# Altium PCB v0.3.PcbDoc
Units mil, origin at the board's own origin, x right, y up, seen from the top; angles counter-clockwise.
Board outline 1750 x 1350 mil, 4 copper layers (Top Layer, Signal Layer 1, Signal Layer 2, Bottom Layer), stack 30.634 mil thick; 75 components, 40 nets, 204 pads, 36 vias.
Unrouted connection lines stored in the file: 2.
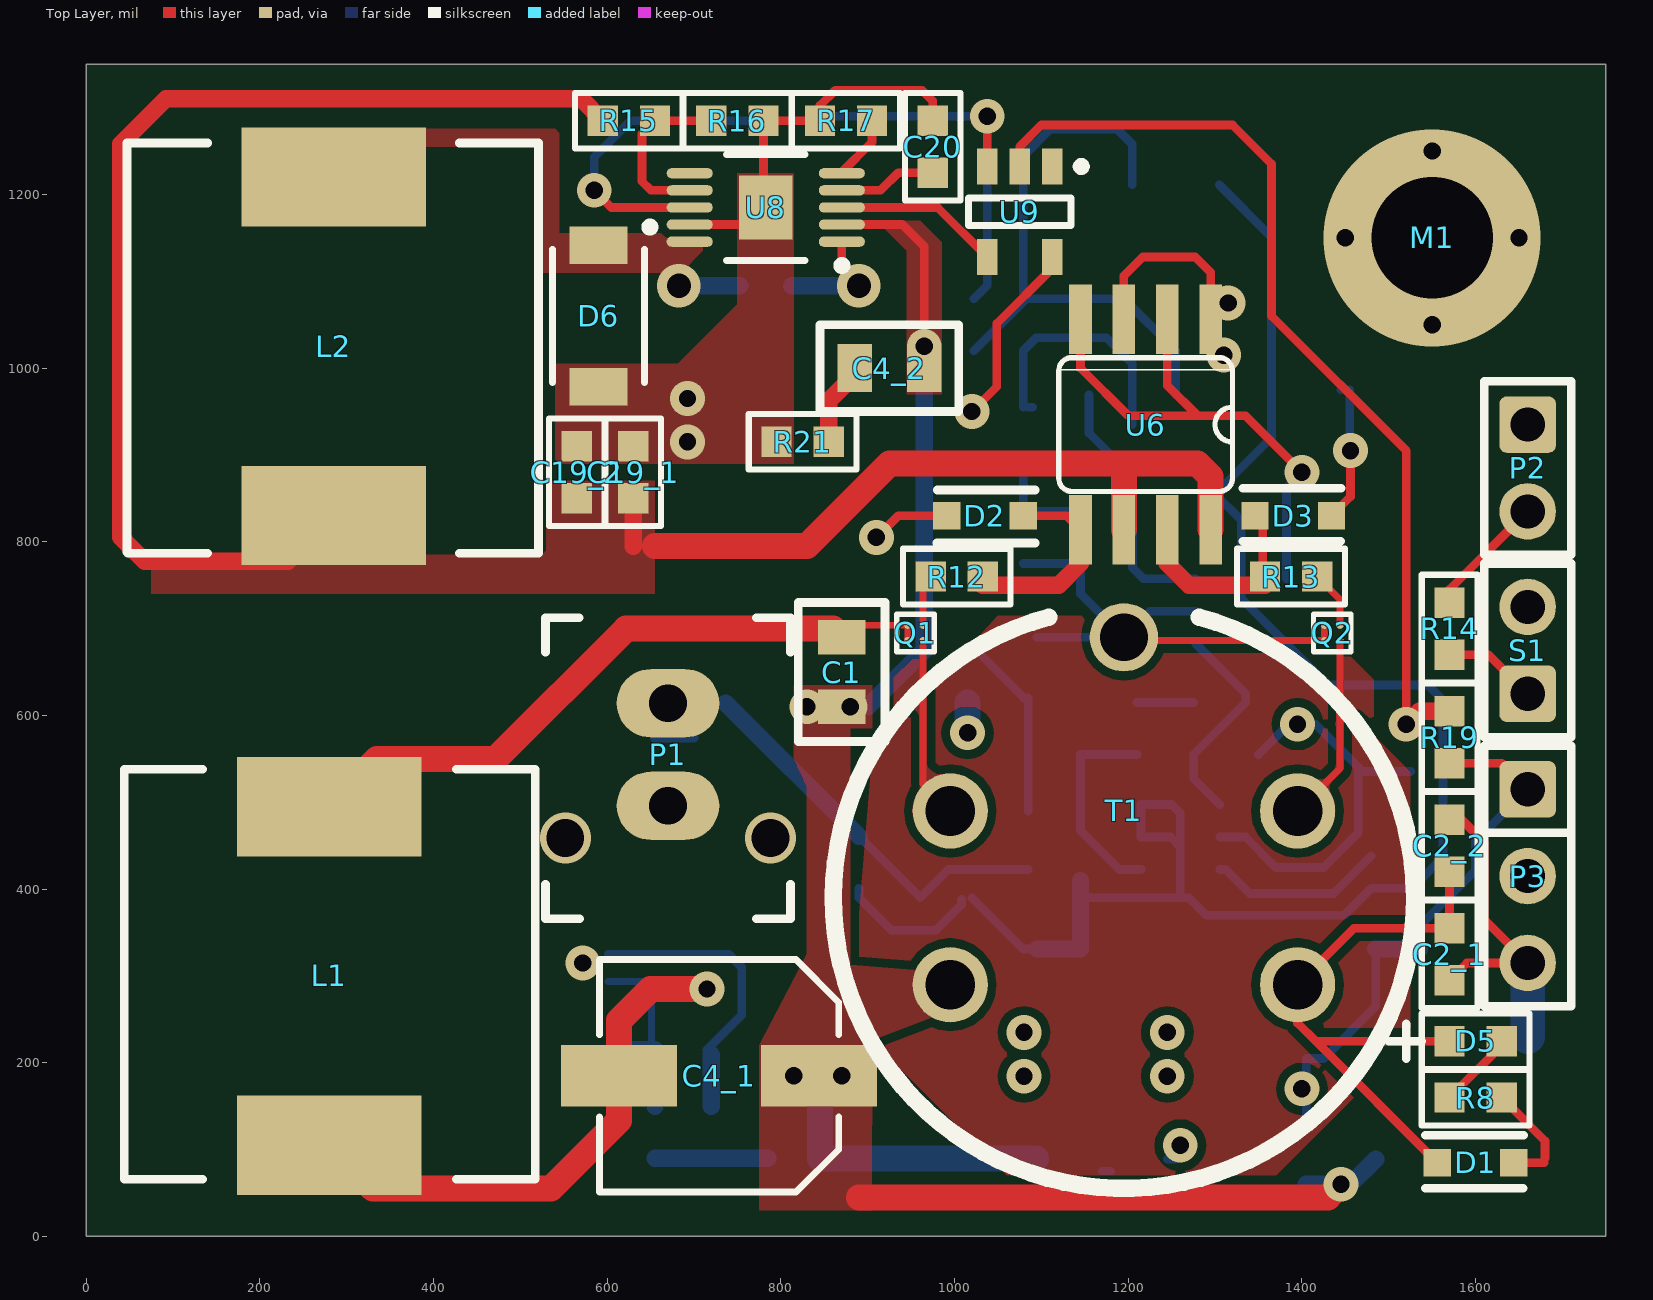
[diagram p0: Top Layer view]
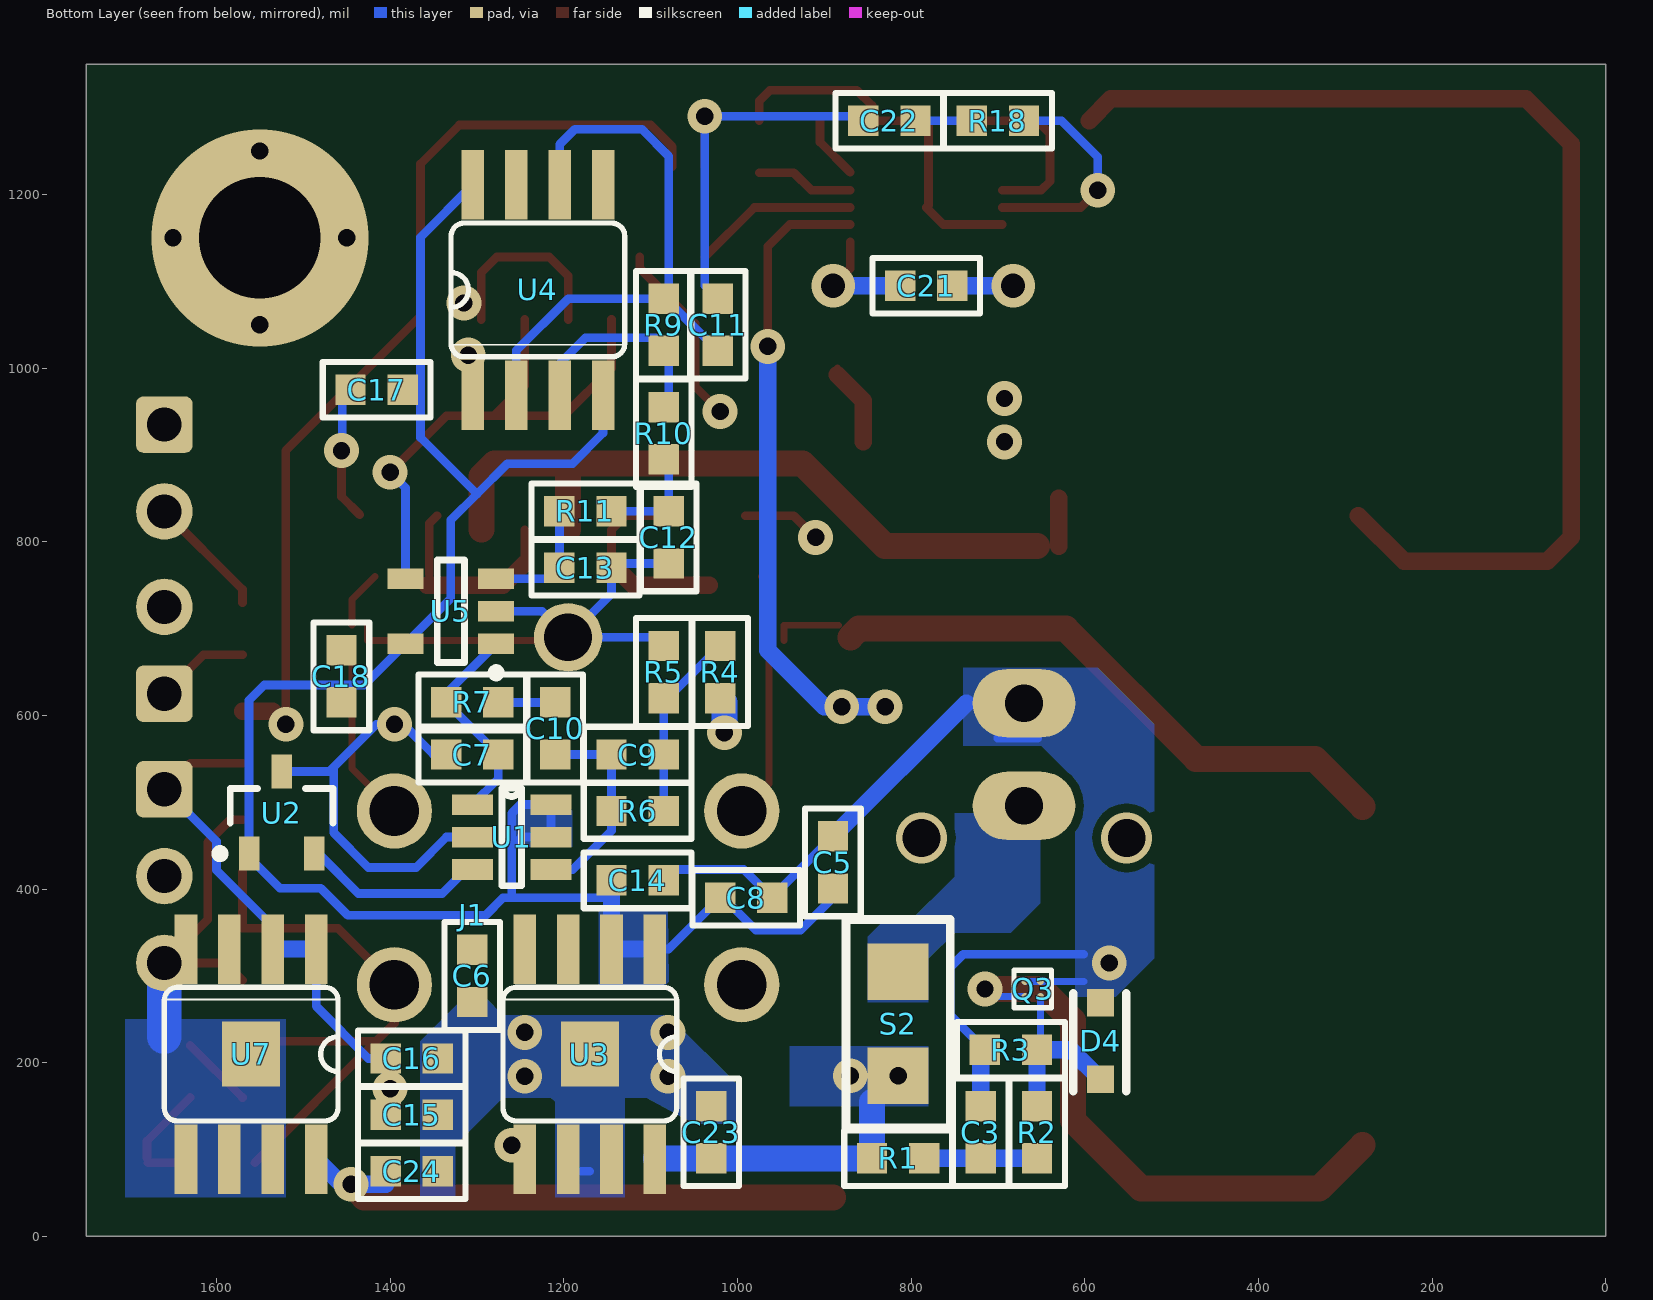
[diagram p1: Bottom Layer view, seen from below]
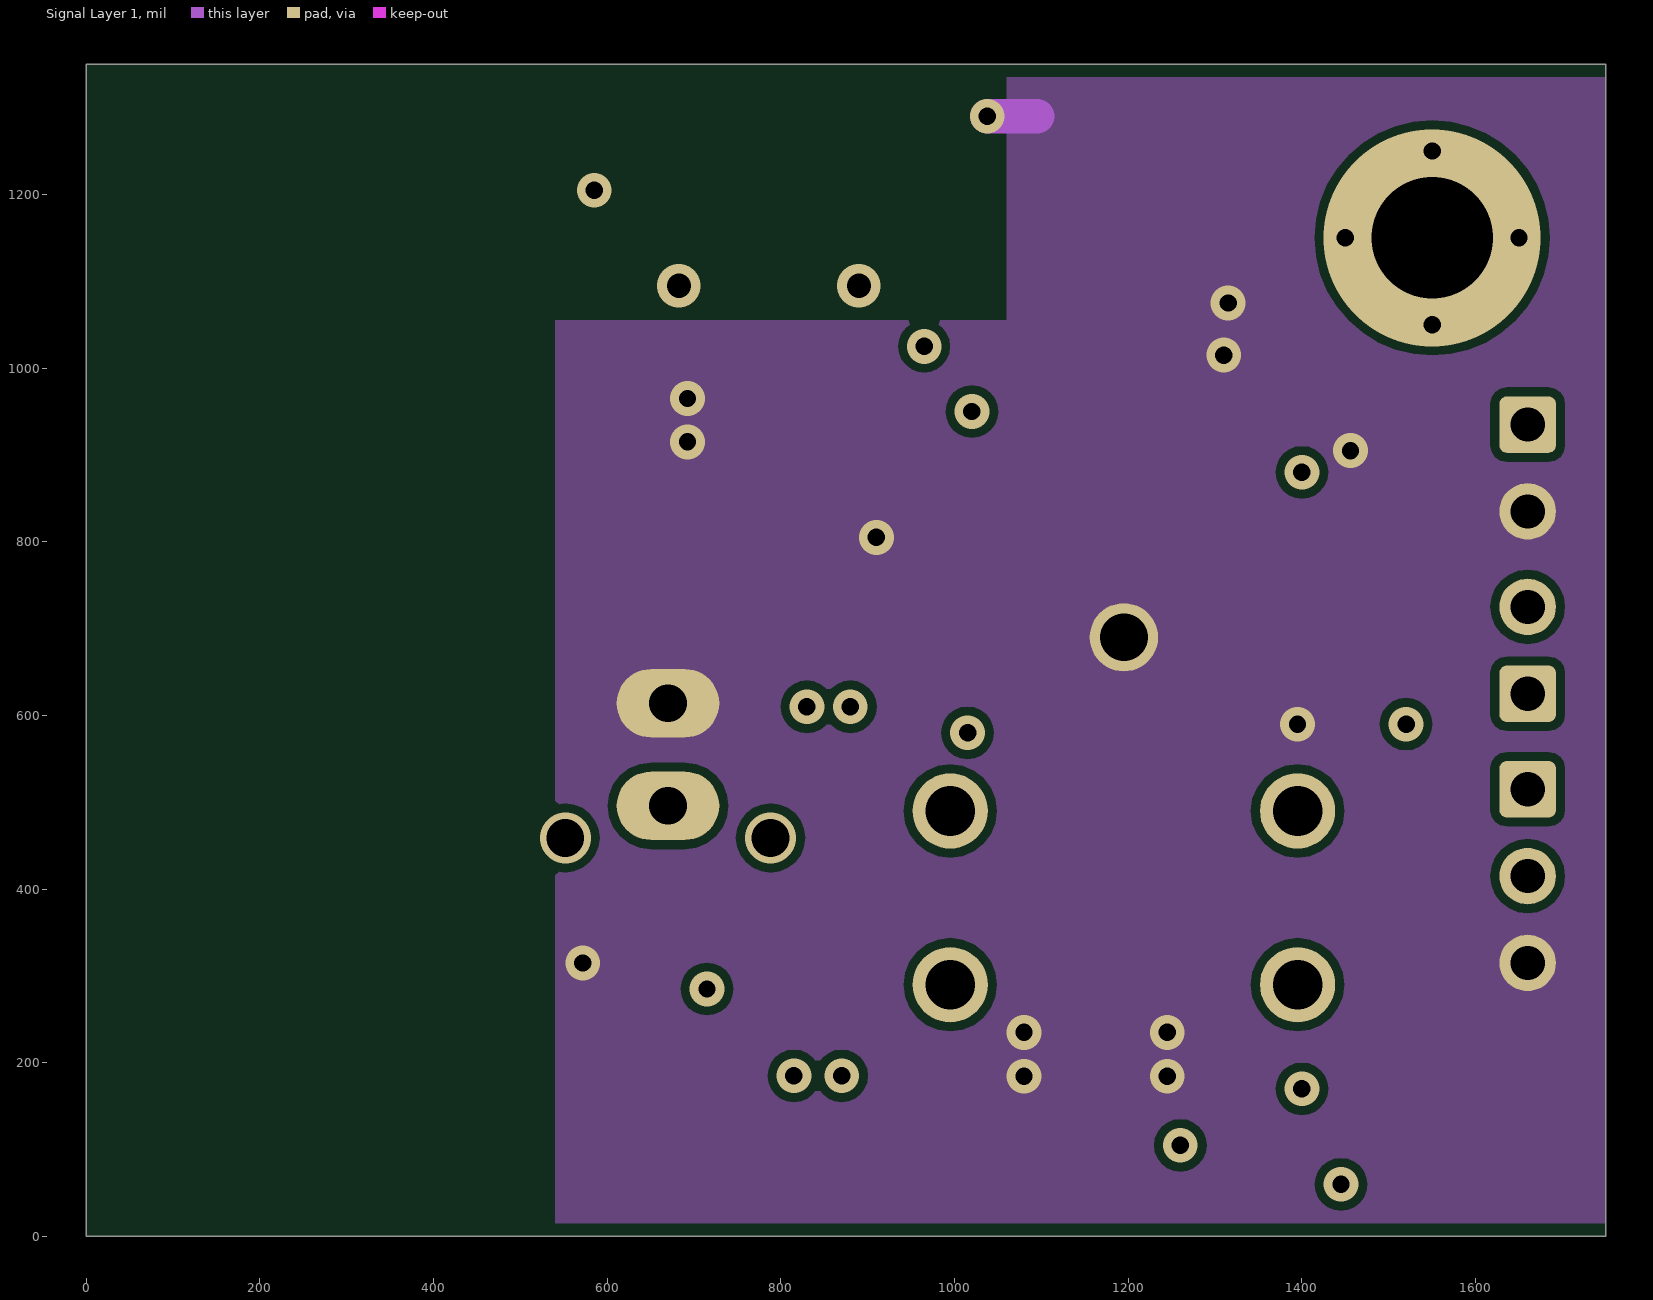
[diagram p2: Signal Layer 1]
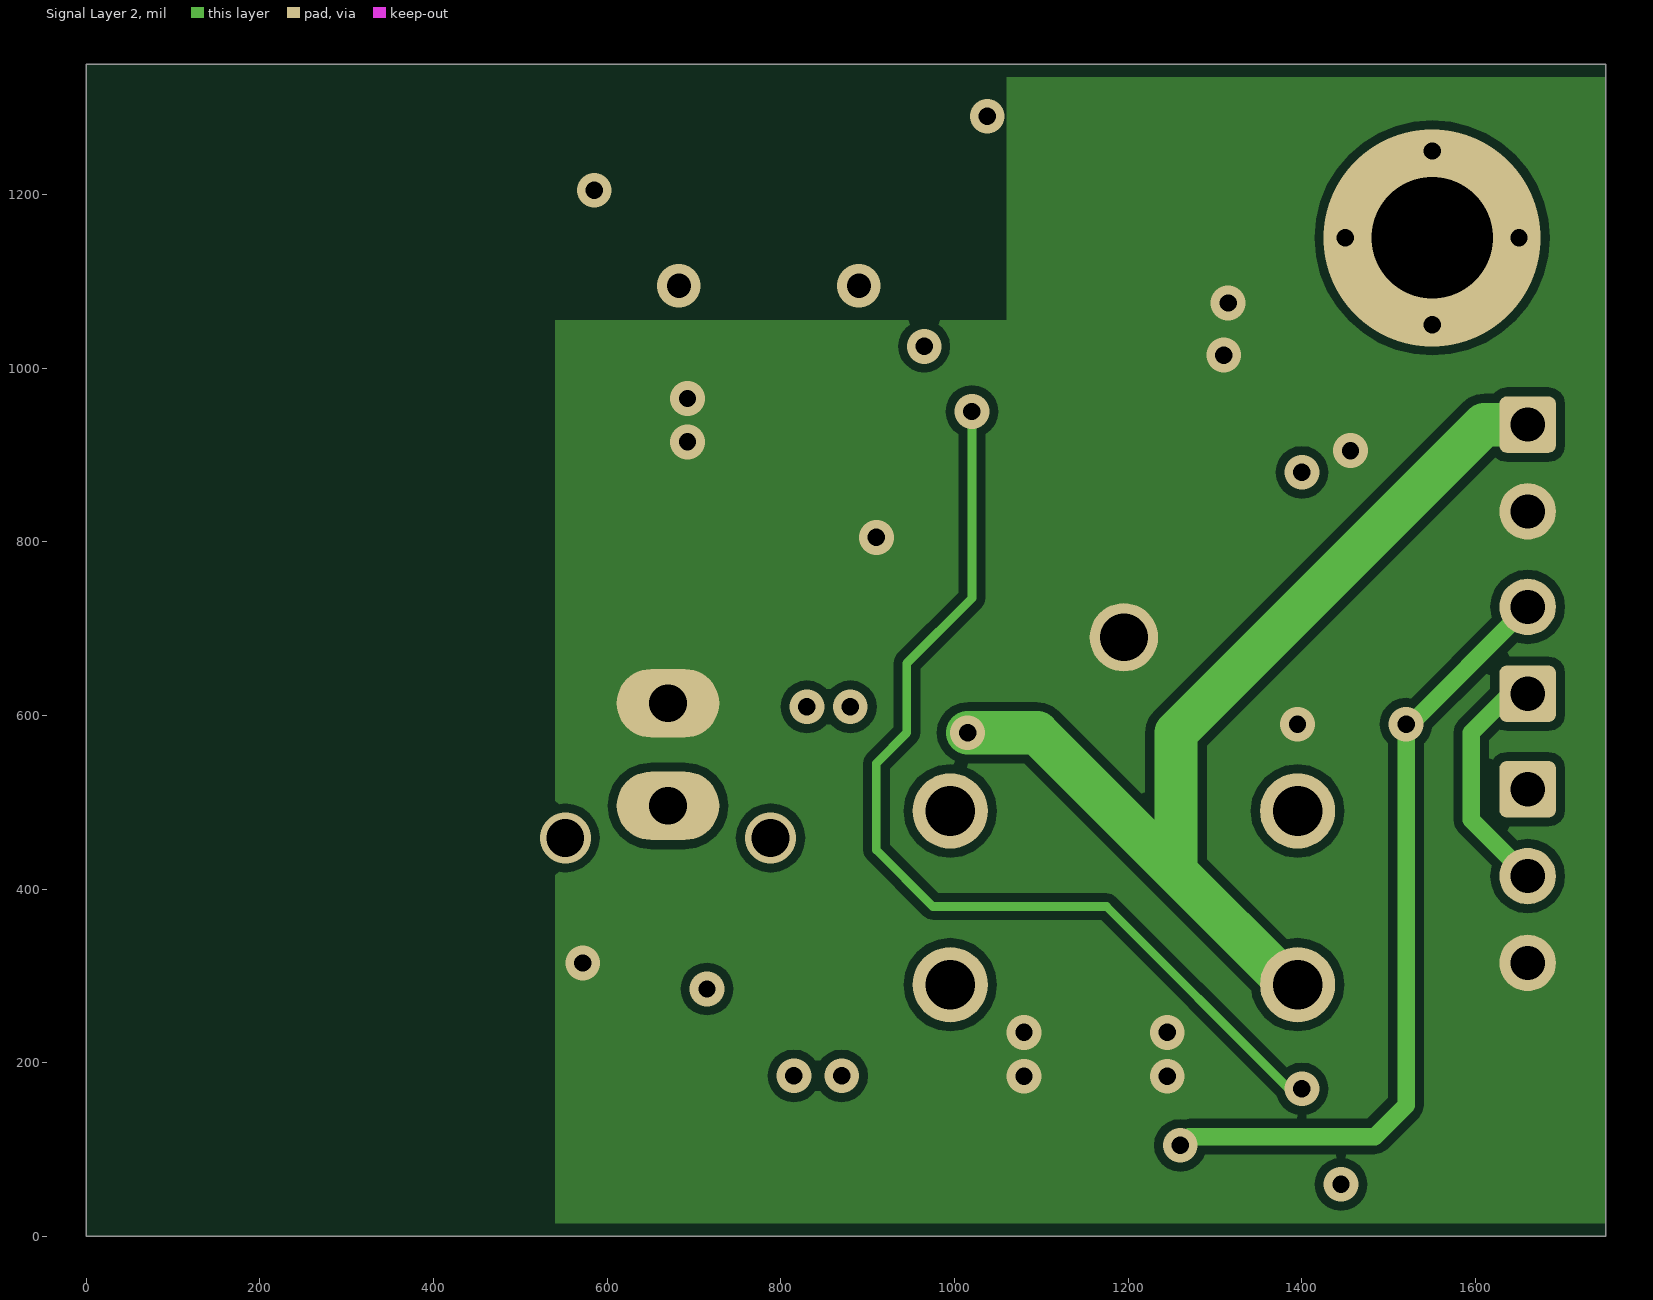
[diagram p3: Signal Layer 2]

## Layer stack, top to bottom
Top Solder: solder mask 0.4, Solder Resist, Dk 3.5
Top Layer: signal copper 1.4
Dielectric 1: core 10, FR-4, Dk 4.2
Signal Layer 1: signal copper 1.417
Dielectric 3: prepreg 5, Dk 4.2
Signal Layer 2: signal copper 1.417
Dielectric 2: core 10, Dk 4.2
Bottom Layer: signal copper 1.4
Bottom Solder: solder mask 0.4, Solder Resist, Dk 3.5

## Board outline
0,0 0,1350 1750,1350 1750,0

## Design rules (kind name [scope] priority, off if disabled: settings)
Clearance [All] p1: gap=10 ignorepadtopadclearanceinfootprint=FALSE except(0: Arc-Hole Track-Hole SMDPad-Hole THPad-Hole Via-Hole Fill-Hole Poly-Hole Region-Hole Text-Hole)
PolygonConnect [All] p1: connectstyle=Direct reliefconductorwidth=10 reliefentries=4 polygonreliefangle="90 Angle" airgapwidth=10
RoutingVias [All] p1: holewidth=28 width=50 viastyle="Through Hole" minholewidth=28 minwidth=50 maxholewidth=28 maxwidth=50
SilkToSilkClearance [All] p1 off: silktosilkclearance=10
SolderMaskExpansion [All] p1: expansion=4
Width [All] p1: maxlimit=50 minlimit=8 preferedwidth=10 midlayer1_minwidth=10 midlayer2_minwidth=10 minimp=50.000000 maximp=50.000000 favimp=50.000000
29 further rules are at their usual default settings.

## Components (designator, comment, footprint, x,y, rotation, side; value= is the part's Value field where it differs from the comment)
C1 "TriCap" TRICAP_0805 870,650 r270 top locked value=1u
C2_1 "TriCap" TRICAP_0603 1570,325 r90 top value=10u
C2_2 "TriCap" TRICAP_0603 1570,450 r270 top value=10u
C3 "Cap" SMD0603_CAP 720,120 r270 bottom value=100n
C4_1 "Cap" CAP_RADIAL_D 728.86,185 r180 top value=10u
C4_2 "TriCap" tricap_0805 925,1000 r0 top value=1u
C5 "Cap" SMD0603_CAP 890,430.75 r90 bottom value=2.2u
C6 "Cap" SMD0603_CAP 1305.28,300 r270 bottom value=2.2u
C7 "Cap" SMD0603_CAP 1305.28,555 r0 bottom value=330p
C8 "Cap" SMD0603_CAP 990,390 r180 bottom value=10n
C9 "Cap" SMD0603_CAP 1115,555 r0 bottom value=500p
C10 "Cap" SMD0603_CAP 1210,585 r270 bottom value=440p
C11 "Cap" SMD0603_CAP 1022.5,1050 r270 bottom value=330p
C12 "Cap" SMD0603_CAP 1079,805 r90 bottom value=330p
C13 "Cap" SMD0603_CAP 1175,770 r180 bottom value=1n
C14 "Cap" SMD0603_CAP 1115,410 r180 bottom value=10n
C15 "Cap" SMD0603_CAP 1375,140 r180 bottom value=2.2u
C16 "Cap" SMD0603_CAP 1375,205 r180 bottom value=10n
C17 "Cap" SMD0603_CAP 1415.57,975 r0 bottom value=10n
C18 "Cap" SMD0603_CAP 1456,645 r90 bottom value=10n
C19_1 "TriCap" TRICAP_0603 630,880 r270 top value=10u
C19_2 "TriCap" TRICAP_0603 565,880 r270 top value=10u
C20 "Cap" SMD0603_CAP 975,1255 r90 top value=100n
C21 "Cap" SMD0603_CAP 782.6,1095 r180 bottom value=100n
C22 "Cap" SMD0603_CAP 825,1285 r0 bottom value=4.7n
C23 "Cap" SMD0603_cap 1030,120 r270 bottom value=100n
C24 "Cap" SMD0603_cap 1375,75 r0 bottom value=100n
D1 "Zener" SOD-323F 1600,85 r180 top
D2 "Zener" SOD-323F 1035,830 r0 top
D3 "Zener" SOD-323F 1390,830.12 r180 top
D4 "Zener" SOD-323F 581.89,225 r270 bottom
D5 "LED" "SMD0603 POLARIZED" 1600,225 r0 top
D6 "Shottky" SOD-128 590,1060 r270 top
J1 "Jumper" JUMPER 1305,370 r270 bottom
L1 "Inductor" NONSTANDARD_10UH 280,300 r180 top value=10u
L2 "Inductor" NONSTANDARD_68UH 285,1025 r0 top value=68u
M1 "MountHole" MOUNTHOLE_M3 1550,1150 r0 top
P1 "Microfit 2x1" "MICROFIT 2X1" 670,555 r180 top
P2 "Header" "HEADER 2X1" 1660,935 r270 top
P3 "Header" "HEADER 3X1" 1660,515 r270 top
Q1 "GaN PowerFET" "GaN Bumped Die" 955,695 r270 top
Q2 "GaN PowerFET" "GAN BUMPED DIE" 1435,695 r270 top
Q3 "GaN PowerFET" "GaN Bumped Die" 660,285 r0 bottom
R1 "Res" SMD0603 815,90 r0 bottom value=200k
R2 "Res" SMD0603 655,120 r270 bottom value=200k
R3 "Res" SMD0603 685,215 r0 bottom value=23.7k
R4 "Res" SMD0603 1020,650 r90 bottom value=73.2k
R5 "Res" SMD0603 1085,650 r90 bottom value=23.7k
R6 "Res" SMD0603 1115,490 r180 bottom value=1M
R7 "Res" SMD0603 1305.28,615 r180 bottom value=200k
R8 "Res" SMD0603 1600,160 r0 top value=2.2k
R9 "Res" SMD0603 1085,1050 r270 bottom value=21k
R10 "Res" SMD0603 1085,925 r270 bottom value=1k
R11 "Res" SMD0603 1175,835 r0 bottom value=3.3k
R12 "Res" SMD0603 1002.5,760 r180 top value=100
R13 "Res" SMD0603 1387.5,760 r0 top value=100
R14 "Res" SMD0603 1570,700 r90 top value=0
R15 "Res" SMD0603 625,1285 r180 top value=200k
R16 "Res" SMD0603 750,1285 r180 top value=36k
R17 "Res" SMD0603 875,1285 r0 top value=200k
R18 "Res" SMD0603 700,1285 r180 bottom value=22k
R19 "Res" SMD0603 1570,575 r90 top value=200k
R21 "Res" SMD0603 825,915 r180 top value=1
S1 "Header" "HEADER 2X1" 1660,625 r90 top
S2 "Fuse_SMD" smd1206 815,245 r270 bottom
T1 "Transformer" P1408 1195,390 r90 top locked
U1 "OPA835" SOT23-6L 1260,460 r180 bottom
U2 "MAX6101" SOT23 1525,488.13 r90 bottom
U3 "RT9068" SOIC-8_PAD 1170,210 r0 bottom
U4 "555" SOIC8 1229.73,1090 r180 bottom
U5 "MCP6541U" SOT23-5LEAD 1330,720 r0 bottom
U6 "LM5110-3M" SOIC8 1220,935 r180 top
U7 "RT9068" SOIC-8_PAD 1560,210 r0 bottom
U8 "TPS54260" MSSOP-10 782.6,1185 r180 top
U9 "NC7SZ04" SOT23-5LEAD 1075,1180 r270 top

## Footprints (in the part's own frame and the unit in brackets; to place one, negate y for a bottom-side part, rotate by r counter-clockwise, add the part's x,y. Pads: shape width x height; smd on the part's side, far side on the other; paste and mask are expansions set on the pad)
CAP_RADIAL_D [mm] "Aluminum Electrolytic Capacitor, Body 7.00x6.60x6.10mm, IPC Low Density"
  rect 3.4x1.8 smd: 1(-2.925,0) 2(2.925,0)
  silkscreen extent -3.5,-3.4 3.5,3.4, body extent -3.87,-3.4 3.88,3.4, height 6.1
"GaN Bumped Die" [mm] "4-Lead"
  round 0.21 smd: D(0.225,0.225) G(-0.225,0.225) S(-0.225,-0.225) S(0.225,-0.225)
  silkscreen extent -0.55,-0.55 0.55,0.55, body extent -0.71,-0.55 0.54,0.55, height 1.35
"GAN BUMPED DIE" [mm] "4-Lead"
  round 0.21 smd: D(0.225,0.225) G(-0.225,0.225) S(-0.225,-0.225) S(0.225,-0.225)
  silkscreen extent -0.55,-0.55 0.55,0.55, body extent -0.71,-0.55 0.54,0.55, height 1.35
"HEADER 2X1" [mil] "PinHeader 1x2 TH Pitch 2.54mm"
  rrect25% 65x65 hole 39.37: 1(0,0)
  round 65 hole 39.37: 2(100,0)
  silkscreen extent -50,-50 150,50, body extent -50,-50 150,50, height 374
"HEADER 3X1" [mil] "PinHeader 1x3 TH Pitch 2.54mm"
  rrect25% 65x65 hole 39.37: 1(0,0)
  round 65 hole 39.37: 2(100,0) 3(200,0)
  silkscreen extent -50,-50 250,50, body extent -50,-50 250,50, height 374
JUMPER [mm]
  round 0.2 smd paste+0 mask+0: 1(-1.27,0) 2(1.27,0)
  body extent -1.6,-0.62 1.58,0.52, height 3.77
"MICROFIT 2X1" [mm]
  oval 3x2 hole 1.1: 1(0,1.5) 2(0,-1.5)
  silkscreen extent -3.58,-4 3.58,4.8, body extent -3.57,-3.97 3.58,7, height 17.6
MOUNTHOLE_M3 [mil]
  body extent -104,-100 104,109, height 71
MSSOP-10 [mm] "TSSOP, 10-Leads, Body 3.00x3.00mm, Pitch 0.50mm, Thermal Pad 1.88x1.57mm, IPC Medium Density"
  oval 1.35x0.3 smd: 1(-2.225,1) 2(-2.225,0.5) 3(-2.225,0) 4(-2.225,-0.5) 5(-2.225,-1) 6(2.225,-1) 7(2.225,-0.5) 8(2.225,0) 9(2.225,0.5) 10(2.225,1)
  rect 1.57x1.88 smd: 11(0,0)
  silkscreen extent -2.35,-1.55 1.15,1.82, body extent -2.45,-1.55 2.45,1.55, height 1.1
NONSTANDARD_10UH [mm]
  rect 5.4x2.9 smd: 1(0,4.95) 2(0,-4.95)
  silkscreen extent -6.02,-6.05 5.99,5.95, body extent -6,-6.05 6,5.95, height 5.97
NONSTANDARD_68UH [mm]
  rect 5.4x2.9 smd: 1(0,4.95) 2(0,-4.95)
  silkscreen extent -6.05,-6.05 5.99,5.95, body extent -6,-6.05 6,5.95, height 9.45
P1408 [mm]
  round 2.2 hole 1.45: 1(-2.54,5.08) 3(2.54,5.08) 4(2.54,-5.08) 6(-2.54,-5.08)
  round 2 hole 1.4: 5(7.62,0)
  silkscreen extent -8.5,-8.5 8.21,8.5, body extent -8.2,-8.2 8.2,8.2, height 12
SMD0603 [mil]
  rect 35x35 smd: 1(-30,0) 2(30,0)
  silkscreen extent -62,-32 62,32, body extent -31,-16 31,16, height 18
"SMD0603 POLARIZED" [mil]
  rect 35x35 smd: 1(-30,0) 2(30,0)
  silkscreen extent -100,-32 62,32, body extent -31,-16 32,16, height 18
SMD0603_CAP [mil]
  rect 35x35 smd: 1(-30,0) 2(30,0)
  silkscreen extent -62,-32 62,32, body extent -37,-22 30,14, height 35
SMD0603_cap [mil]
  rect 35x35 smd: 1(-30,0) 2(30,0)
  silkscreen extent -62,-32 62,32, body extent -37,-22 30,14, height 35
smd1206 [mil]
  rect 65x70 smd: 1(-60,0) 2(60,0)
  silkscreen extent -120,-60 120,60, body extent -61,-30 61,31, height 22
SOD-128 [mm] "SODFL, 2-Leads, Body 2.50x4.70mm, IPC Medium Density"
  rect 1.1x1.7 smd: A(2.075,0) K(-2.075,0)
  silkscreen extent -2.72,-1.35 1.95,1.63, body extent -2.6,-1.35 2.6,1.35, height 1.11
SOD-323F [mm]
  rect 0.8x0.8 smd: A(-1.12,0) K(1.12,0)
  silkscreen extent -1.4,-0.8 1.47,0.75, body extent -1.38,-0.77 1.48,0.73, height 1.12
SOIC8 [mil]
  rect 26x80 smd mask+3: 1(-75,-121) 2(-25,-121) 3(25,-121) 4(75,-121) 5(75,121) 6(25,121) 7(-25,121) 8(-75,121)
  silkscreen extent -100,-77 100,77, body extent -96,-118 96,118, height 69
SOIC-8_PAD [mil]
  rect 26x80 smd mask+3: 1(-75,-121) 2(-25,-121) 3(25,-121) 4(75,-121) 5(75,121) 6(25,121) 7(-25,121) 8(-75,121)
  rect 66.93x74.8 smd: 9(0,0)
  silkscreen extent -100,-77 100,77, body extent -96,-118 96,118, height 69
SOT23 [mm] "SOT23, 3-Leads, Body 2.90x2.45mm, Pitch 0.95mm, IPC Medium Density"
  rect 1x0.6 smd: 1(-1.2,0.95) 2(-1.2,-0.95) 3(1.2,0)
  silkscreen extent -1.32,-1.5 0.7,1.93, body extent -1.26,-1.49 1.29,1.51, height 1
SOT23-5LEAD [mm] "SOT23, 5-Leads, Body 2.95x2.80mm, Pitch 0.95mm, IPC Medium Density"
  rect 1.05x0.6 smd: 1(-1.325,0.95) 2(-1.325,0) 3(-1.325,-0.95) 4(1.325,-0.95) 5(1.325,0.95)
  silkscreen extent -1.45,-1.5 0.4,1.92, body extent -1.66,-1.5 1.55,1.5, height 0.92
SOT23-6L [mm] "ESDA6V1BC6"
  rect 1.2x0.6 smd: 1(-1.15,0.95) 2(-1.15,0) 3(-1.15,-0.95) 4(1.15,-0.95) 5(1.15,0) 6(1.15,0.95)
  silkscreen extent -0.28,-1.43 0.28,1.43, body extent -1.42,-1.51 1.42,1.41, height 1.1
TRICAP_0603 [mil]
  rect 35x35 smd: 1(-30,0) 2(30,0)
  silkscreen extent -62,-32 62,32, body extent -33,-18 33,18, height 106
TRICAP_0805 [mil]
  rect 40x55 smd: 1(-40,0) 2(40,0)
  silkscreen extent -80,-50 80,50, body extent -41,-27 41,27, height 159
tricap_0805 [mil]
  rect 40x55 smd: 1(-40,0) 2(40,0)
  silkscreen extent -80,-50 80,50, body extent -41,-27 41,27, height 159

## Part data
C3 C5 C6 C7 C8 C9 C10 C11 C12 C13 C14 C15 C16 C17 C18 C20 C21 C22 C23 C24: library part "Capacitor Ceramic", "Ceramic Chip Capacitor"
C4_1: library part "Capacitor Polarized", "Polarized Capacitor (Surface Mount)"
P2 S1: library part "Header 2x1", "Header, 2-Pin"
P3: library part "Header 3x1", "Header, 2-Pin"
R1 R2 R3 R4 R5 R6 R7 R8 R9 R10 R11 R12 R13 R14 R15 R16 R17 R18 R19 R21: library part Resistor, "Resistor"
L1 L2: Code_IEC=1005, Code_JEITA=0402, LatestRevisionDate=29-May-2009, LatestRevisionNote="IPC-7351 Footprint Added.", PackageDescription="Chip Inductor", PackageReference=0402-A, Published=8-Jun-2000, Publisher="Altium Limited"

## Via types
v1: diameter 40, hole 20, Top Layer to Bottom Layer, 31 vias
v2: diameter 50, hole 28, Top Layer to Bottom Layer, 2 vias
v3: diameter 59.06, hole 43.31, Top Layer to Bottom Layer, 2 vias
v4: diameter 250, hole 140, Top Layer to Bottom Layer, 1 vias

## Nets (pads, with @x,y where several pads share a name; then routed paths per layer and width w, separated by ;. In a path a pad name is that pad's centre, name@x,y a point inside that pad or via, vN(x,y) a via of type N, cw(c..) or ccw(c..) an arc to the next point about the centre after c; other vN are vias at no path point)
1v25: J1.1 U1.3 U2.2 | length 204.1
  Bottom Layer w10: U1.3 1312.4,422.6 1340,395 1436.59,395 U2.2@1480,438.41
5v0: C5.1 C8.1 C14.1 C17.1 C18.1 U1.5 U1.6 U2.1 U3.1 U3.2 U4.4 U4.8 U5.5 | length 2299.2
  Bottom Layer w10: C5.1 890,390 927.5,352.5 978.71,352.5 1008.11,381.89 C8.1@1008.11,388.11 ; C8.1 1079,331 U3.1 ; 1145,390 1260,390 ; U4.4 1154.73,925.27 1190,890 1265,890 1300,855 ; U4.8 1365,1150.73 1365,920 1300,855 ; 1260,390 1270,390 1290,370 1448.86,370 1480,401.14 1526.73,401.14 1562.4,436.81 U2.1 1562.4,617.6 1545,635 1429.76,635 U5.5 1330,734.76 1330,825 1300,855 ; 1260,390 1260,448.62 ; 1260,448.62 1248.62,460 U1.5 U1.6 1250.02,497.4 1260,487.42 1260,448.62
  Bottom Layer w20: U3.1 U3.2 1145,390 C14.1
GND: C2_1.1 C2_2.1 C3.1 C5.2 C6.2 C7.2 C8.2 C11.1 C12.1 C13.2 C14.2 C15.2 C16.2 C17.2 C18.2 C19_1.1 C19_2.1 C20.2 C22.2 C23.1 C24.1 D1.A D2.A D3.A D4.A D6.A P1.2 P2.2 P3.3 Q2.S Q3.S R3.2 R5.2 R8.2 R14.2 R16.1 R17.1 R21.2 T1.5 U1.2 U2.3 U3.6 U3.7 U3.9 U4.1 U5.2 U6.1 U6.3 U7.5 U7.6 U7.7 U7.9 U8.9 U8.11 U9.3 | length 4086.3
  Top Layer w8: T1.5@1198.86,686.14 1426.14,686.14 Q2.S@1426.14,703.86
  Top Layer w10: U8.9 762.91,1165.31 U8.11 ; U8.11@780,1187.6 R16.1 R17.1 845,1302.36 862.64,1320 962.5,1320 975,1307.5 C20.2 ; v1(910,805) 935.12,830.12 D2.A@990.91,830.12 ; U9.3 v1(1037.6,1290) ; U6.3 1195,1106.14 1216.69,1127.83 1277.17,1127.83 1295,1110 U6.1 ; D3.A@1435,831.02 1456,852.02 v1(1456,905) ; C2_1.1 1590,315 P3.3 1610,365 1610,453.94 1583.94,480 C2_2.1 ; R14.2 1570,745 P2.2 ; R8.2 1680,110 1680,90 ; D1.A 1679,85
  Signal Layer 1 w40: v1(1037.6,1290) 1095,1290
  Bottom Layer w8: 601.14,293.86 651.14,293.86 Q3.S@668.86,293.86
  Bottom Layer w10: 601.14,325 740,325 755,310 755,255 R3.2 ; 654.06,574.06 700,574.06 ; C22.2 860,1290 v1(1037.6,1290) 1037.6,1095.1 C11.1 ; C5.2 960.37,390.37 992.6,422.6 C14.2@1085,422.6 ; C12.1 C13.2@1140,775 ; R5.2@1095,690 T1.5 ; C13.2 1145,740 T1.5 ; 1170,75 1180,75 ; T1.5@1200,690 T1.5 ; U5.2 1225,720 T1.5 ; U1.2 1335,460 1370,425 1425,425 1465,465 1465,540.57 ; C7.2@1350,555 1385,590 v1(1395,590) 1415.57,590 1465,540.57 ; C17.2@1445,975 1455,975 v1@1455,906 ; U2.3 1470.2,535.37 1465,540.57
  Bottom Layer w20: C3.1 R3.2@720,209.43 ; 736.69,614.06 C5.2
  Bottom Layer w40: 1660,230 P3.3
  other v1: 1080,184.43 1245,184.43 1080,235 1245,235 571.82,315 692.5,915 692.5,965 1310,1015 1315,1075
NetC1_1: C1.1 L1.2 Q1.S | length 759.1
  Top Layer w8: C1.1@883.86,703.86 946.14,703.86 Q1.S@946.14,686.14
  Top Layer w30: L1.2 335.12,550 471.89,550 621.89,700 860,700 C1.1
NetC3_2: C3.2 R1.1 R2.2 | length 130
  Bottom Layer w20: R2.2 C3.2 R1.1
NetC4_1_2: C4_1.2 L1.1 Q3.D | length 668.2
  Top Layer w30: L1.1 330.12,55 535,55 613.7,133.7 C4_1.2 613.7,248.7 650,285 v1(715,285)
  Bottom Layer w8: Q3.D v1@706.14,276.14
  Bottom Layer w10: v1@706.14,276.14 v1(715,285)
NetC4_2_1: C4_2.1 R21.1 | length 99.8
  Top Layer w8: C4_2.1@885,992.36 C4_2.1
  Top Layer w10: C4_2.1@885,990 C4_2.1@885,992.36
  Top Layer w20: R21.1 855,962.36 C4_2.1@885,992.36
NetC6_1: C6.1 J1.2
NetC9_1: C9.1 R4.2 R5.1 R6.2 | length 214.9
  Bottom Layer w10: R4.2 R5.1@1080,620 ; R6.2 C9.1 R5.1
NetC9_2: C9.2 C10.2 R6.1 U1.4 | length 240.9
  Bottom Layer w10: C10.2 C9.2 R6.1 1145,467.35 1189.75,422.6 U1.4
NetC10_1: C10.1 R7.2 | length 65.3
  Bottom Layer w10: C10.1 R7.2
NetC11_2: C11.2 R9.1 U4.2 U4.6 | length 689.6
  Bottom Layer w10: C11.2 1082.5,1080 R9.1 1195,1080 1254.73,1020.27 U4.2 ; R9.1@1079,1080 1079,1244 1110,1275 1187.47,1275 1204.73,1257.74 U4.6
NetC12_2: C12.2 R10.2 R11.1 | length 126
  Bottom Layer w10: R10.2@1079,895 C12.2 R11.1
NetC20_1: C20.1 U8.4 | length 112.8
  Top Layer w10: U8.4 914.8,1204.69 ; 915.12,1205 935.12,1225 C20.1
NetC21_1: C21.1 U8.1 | length 136.1
  Top Layer w10: U8.1 870.2,1114.69 v2(889.88,1095)
  Bottom Layer w20: C21.1 v2(889.88,1095)
NetC21_2: C21.2 D6.K L2.1 U8.10 | length 70
  Bottom Layer w20: v2(682.6,1095) C21.2
NetC22_1: C22.1 R18.1 | length 65
  Bottom Layer w10: R18.1 C22.1
NetD4_K: D4.K Q3.G R2.1 R3.1 | length 215
  Bottom Layer w8: R3.1@651.14,218.86 Q3.G
  Bottom Layer w10: R3.1@651.14,218.86 R3.1
  Bottom Layer w20: D4.K 615.98,215 R3.1 R2.1
NetD5_2: D5.2 R8.1 | length 84.9
  Top Layer w10: R8.1 D5.2@1630,220
NetP1_1: P1.1 S2.1
NetP3_2: P3.2 R14.1 S1.1 | length 384.2
  Top Layer w10: R14.1 1615,670 S1.1
  Signal Layer 2 w10: S1.1@1640,625 S1.1
  Signal Layer 2 w20: S1.1@1640,625 1595,580 1595,480 P3.2
NetQ1_D: Q1.D T1.3 | length 209
  Top Layer w8: Q1.D 963.86,521.14 T1.3
NetQ1_G: Q1.G R12.2 | length 59.7
  Top Layer w8: Q1.G 963.86,751.36 R12.2
NetQ2_D: Q2.D T1.4 | length 216.4
  Top Layer w8: T1.4 1443.86,538.86 Q2.D
NetQ2_G: Q2.G R13.2 | length 67.1
  Top Layer w8: R13.2 1443.86,733.64 Q2.G
NetR15_1: R15.1 R16.2 U8.7 | length 200
  Top Layer w10: 650,1205 640,1215 640,1270 R15.1 R16.2 ; 650.32,1204.69 U8.7
NetR17_2: R17.2 U8.5 | length 73.8
  Top Layer w10: U8.5@870.2,1225.59 905,1260.39 R17.2
NetR18_2: R18.2 U8.8 | length 259
  Top Layer w10: v1(585,1204.69) 604.68,1185 U8.8
  Bottom Layer w10: v1(585,1204.69) 585,1243.18 626.82,1285 R18.2
PD: R19.2 S1.2 U3.5 U9.2 | length 2027.2
  Top Layer w10: U9.2 1075,1255 1100,1280 1320,1280 1365,1235 1365,1060 1520,905 v1(1520,590)
  Top Layer w20: v1(1520,590) 1535,605 R19.2
  Signal Layer 2 w20: v1(1260,105) 1270,115 1483.8,115 1520,151.2 1520,585 S1.2
  Bottom Layer w10: U3.5 U3.5@1254,89
PDbar: U8.3 U9.4 | length 191.1
  Top Layer w10: U8.3 980.43,1185 U9.4
V555: R9.2 R10.1 U4.3 | length 284.8
  Bottom Layer w10: R10.1@1079,955 1079,1020 1094,1035 1175,1035 1204.73,1005.27 U4.3 U4.3@1204.73,934.73 ; R10.1 R10.1@1090,955
VBAT: C1.2 C4_1.1 C4_2.2 C23.2 C24.2 R1.2 S2.2 T1.1 U3.8 U7.8 U8.2 | length 1724.4
  Top Layer w10: U8.2 939.69,1165.31 ; 939.69,1165 940,1165 965,1140 v1(965,1025) C4_2.2
  Top Layer w30: 889.88,45 1430,45 v1(1445,60)
  Bottom Layer w20: v1(830,610) v1(880,610) 900,610 965,675 v1(965,1025) ; C24.2@1405,60 v1(1445,60) 1456,60 U7.8
  Bottom Layer w30: S2.2@845,155 R1.2 C23.2 U3.8@1094,90
  other v1: 815,185 870,185
Vbuck: C19_1.2 C19_2.2 L2.2 R15.2 U6.6 U6.8 | length 2199.8
  Top Layer w20: L2.2 232.38,777.5 67.5,777.5 40,805 40,1258.05 91.95,1310 570,1310 R15.2 ; 630,795 C19_1.2 ; 1185,890 1195,880
  Top Layer w30: 655,795 830,795 925,890 1185,890 1280,890 1295,875 U6.8 ; U6.6 1195,880
Vcmp: U5.4 U6.2 U6.4 | length 616.2
  Top Layer w10: U6.4 1145,1000 1200,945 1280,945 ; U6.2 1245,980 1280,945 ; v1(1400,880) 1335,945 1280,945
  Bottom Layer w10: U5.4 1382.17,862.17 v1(1400,880)
Vconst5: C15.1 C16.1 P3.1 R19.1 U7.1 U7.2 U9.5 | length 1994.6
  Top Layer w10: v1(1020,950) 1048.77,978.77 1048.77,1051.27 1112.4,1114.9 U9.5 ; R19.1 1630,545 P3.1
  Signal Layer 2 w10: v1(1020,950) 1020,735 945,660 945,580 910,545 910,445 975,380 1175,380 1385,170 v1(1400,170)
  Bottom Layer w10: C15.1 C16.1 1425,205 1485,265 U7.1 ; U7.2 1535,356.89 1600,421.89 1600,455 P3.1
  Bottom Layer w20: U7.1 U7.2
Vopa: C7.1 R7.1 U1.1 U5.1 | length 246.3
  Bottom Layer w10: U5.1 1335.28,625.16 R7.1 C7.1 1275.28,527.4 U1.1
VOUT: C2_1.2 C2_2.2 D1.K D5.1 P2.1 R4.1 T1.6 | length 1939.8
  Top Layer w10: D1.K 1415.91,225 ; D5.1 1415.91,225 ; C2_2.2 C2_1.2 1460,355 T1.6 1395,245.91 1415.91,225
  Signal Layer 2 w30: T1.6@1385,290 T1.6
  Signal Layer 2 w50: v1(1015,580) 1095,580 1255,420 ; T1.6@1385,290 1255,420 ; P2.1 1610,935 1255,580 1255,420
  Bottom Layer w30: v1(1015,580) R4.1@1015,615
Vq1: D2.K R12.1 U6.5 | length 234.4
  Top Layer w10: D2.K@1079.09,830.12 1128.88,830.12 U6.5 U6.5@1145,775
  Top Layer w20: R12.1@1032.5,750 1120,750 U6.5@1145,775
Vq2: D3.K R13.1 U6.7 | length 233.2
  Top Layer w10: U6.7@1245,775 U6.7 ; D3.K 1355,821.02 R13.1@1355,762.5
  Top Layer w20: U6.7@1245,775 1270,750 R13.1@1357.5,750
Vtri: C13.1 R11.2 U5.3 | length 143.1
  Bottom Layer w10: R11.2 C13.1 1217.6,757.4 U5.3
pads on no net: U3.3 U3.4 U4.5 U4.7 U7.3 U7.4 U8.6 U9.1
copper on no net:
  other v1: 1550,1050 1450,1150 1650,1150 1550,1250
  other v3: 551.89,458.94 788.11,458.94
  other v4: 1550,1150

## Polygon pours and split planes (outlines as drawn)
VBAT on Top Layer "vbat_1" (solid, remove dead copper, pour order 16): 815,635 880,635 880,312.79 980.91,305 980.91,255 905.06,225.7 904.9,30 775,30 775,220 830,325 830,518.12 815,550
VBAT on Top Layer "vbat_11" (solid, pour order 46): 830,635 905,635 905,585 830,585
NetQ2_D on Top Layer "q2_d1" (solid, remove dead copper, pour order 44): 1442.5,667.5 1456.36,667.5 1482.5,641.36 1482.5,512.5 1452.5,482.5 1382.5,482.5 1382.5,517.5 1437.5,572.5
NetQ1_D on Top Layer "q1_d1" (solid, remove dead copper, pour order 42): 965,665 951.14,665 930,643.86 930,505 955,480 1025,480 1025,515 970,570
no net on Top Layer "none" (solid, pour order 40): 1345,715 1525,535 1525,225 1315,15 1080,15 1080,50.76 880.38,250.38 905.06,555 1050,715
GND on Top Layer "gnd_bottom" (solid, remove dead copper, pour order 12): 815,1224.37 750,1224.37 750,1073.54 681.46,1005 540,1005 540,895 545,890 815,890 815,975
VBAT on Top Layer "gnd_bottom" (solid, remove dead copper, pour order 10): 985,970 945,970 945,1135 920,1160 920,1170 960,1170 985,1145
NetC21_2 on Top Layer "gnd_bottom" (solid, remove dead copper, pour order 8): 710,1135 685,1110 525,1110 525,1155 710,1155
Vbuck on Top Layer "gnd_bottom" (solid, remove dead copper, pour order 6): 655,870 655,740 75,740 75,785 525,785 530,790 530,870
NetC21_2 on Top Layer "gnd_bottom" (solid, remove dead copper, pour order 4): 540,1275.63 545,1270.47 545,1145 525,1145 525,1255 340.75,1255 340.75,1275.63
no net on Top Layer "gnd_bottom" (solid, remove dead copper, pour order 2): 1485,225
GND on Bottom Layer "gnd_33" (solid, remove dead copper, pour order 56): 1270,255 1290,275 1315,275 1365,225 1365,45 1325,45 1325,105 1270,160
GND on Bottom Layer "gnd_32" (solid, remove dead copper, pour order 54): 1520,250 1520,45 1705,45 1705,250
5v0 on Bottom Layer "5v0_3" (solid, remove dead copper, pour order 52): 1080,375 1160,375 1160,290 1079,290
5v0 on Bottom Layer "5v0_12" (solid, pour order 50): 1190,490 1204.94,504.94 1254.51,496.79 1260,448.62 1190,448.62
GND on Bottom Layer "gnd_8" (solid, remove dead copper, pour order 48): 1050,130 995,130 995,170 1080,255 1270,255 1270,160 1255,160 1215,160 1210,155 1210,45 1130,45 1130,160 1105,160
GND on Bottom Layer "gnd_1" (solid, remove dead copper, pour order 22): 740,655 585,655 520,590 520,320.28 564.13,276.14 611.14,276.14 611.14,526.14 650,565 740,565
NetP1_1 on Bottom Layer "fuse1" (solid, remove dead copper, pour order 26): 651.14,487.13 651.14,383.86 685,350 750,350 780,320 780,270 850,270 850,345 835,360 804.41,360 750,414.41 750,487.13
no net on Bottom Layer "gnd_bottom" (solid, remove dead copper, pour order 24): 606.14,450.15
VBAT on Bottom Layer "vbat_2" (solid, remove dead copper, pour order 18): 780,218.86 940,218.86 940,150 780,150
GND on Signal Layer 1 "gnd_main" (solid, remove dead copper, pour order 38): 1750,1335 540,1335 540,775 540,15 845,15 1540,15 1750,15
no net on Signal Layer 1 "gnd_bottom" (solid, remove dead copper, pour order 36): 2215,1335
GND on Signal Layer 2 "gnd_main_2" (solid, remove dead copper, pour order 58): 1750,1335 540,1335 540,775 540,15 845,15 1540,15 1750,15

## Other copper
Signal Layer 1:
  pour cut-out: 10,750 10,1340 1060,1340 1060,1055 530,1055 530,750
Signal Layer 2:
  pour cut-out: 10,750 10,1340 1060,1340 1060,1055 530,1055 530,750